# Altium PCB bms_afe_tester-1_1.PcbDoc (part 5 of 6)
Units mm, origin at the board's own origin, x right, y up, seen from the top; angles counter-clockwise.
Board outline 410 x 67 mm, 4 copper layers (L1, L2, L3, L4), stack 1.586 mm thick; 598 components, 356 nets, 1901 pads, 1542 vias.
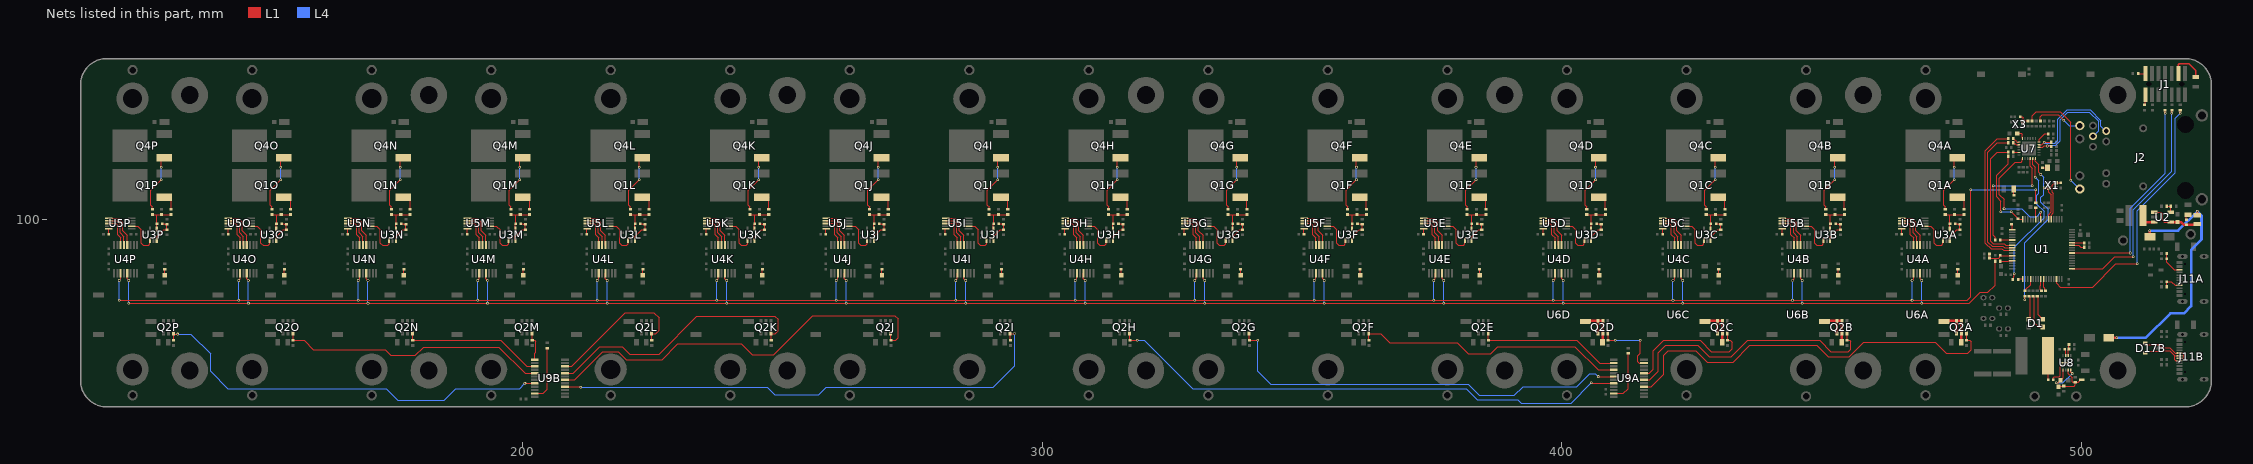
[diagram p6: the nets of this part, all layers, seen from the top]

## Via types
v1: diameter 0.5, hole 0.3, L1 to L4, 1524 vias
v2: diameter 0.65, hole 0.3, L1 to L4, 10 vias
v3: diameter 0.9, hole 0.6, L1 to L4, 8 vias

## Nets (pads, with @x,y where several pads share a name; then routed paths per layer and width w, separated by ;. In a path a pad name is that pad's centre, name@x,y a point inside that pad or via, vN(x,y) a via of type N, cw(c..) or ccw(c..) an arc to the next point about the centre after c; other vN are vias at no path point) (continued)
NetC3_1: C3.1 R5.1 R24.2 U1.27 | length 5.5
  L1 w0.2: R24.2@482.3,93.4 R5.1@482.3,92.6 484.1,92.6 484.252,92.752 484.252,92.952 484.4,93.1 U1.27@486.7,93.1
NetC10_1: C10.1 D5.2 R15.1 R45.2 U8.11 | length 8.5
  L1 w0.2: C10.1@495.6,67.85 495.75,68 R15.1@496.6,68 498.6,68 498.8,68.2 R45.2@498.8,68.7 ; U8.11@497.45,71.1 497.45,70.35 498.2,69.6 498.2,68.8 498.3,68.7 R45.2@498.8,68.7 ; D5.2@500.03,69.2 499.9,69.2 499.4,68.7 R45.2@498.8,68.7
NetC13_1: C13.1 R11.1 | length 1.2
  L1 w0.2: C13.1@486.95,105.9 487,105.85 R11.1@487,104.7
NetC17_1: C17.1 R9.1 | length 1.1
  L1 w0.2: R9.1@520.2,100 520.2,100.65 C17.1@520.5,100.95
NetC18_1: C18.1 FB2.2 R9.2 U2.1 U2.4 | length 10.1
  L1 w0.2: U2.1@513.99,101.45 515.25,101.45 515.6,101.1 515.6,99.9 515.95,99.55 U2.4@517.21,99.55
  L1 w0.5: U2.4@517.21,99.55 C18.1@518.5,99.55 519.15,99.55 519.7,99 R9.2@520.2,99 522.15,99 FB2.2@522.3,99.15
NetC21A_1: C21A.1 R42A.2 R53A.2 R55A.2 U3A.4 | length 6.4
  L1 w0.2: R55A.2@473.8,101 474.7,101 ; U3A.4@474.65,98.2 474.65,99.15 C21A.1@474.7,99.2 474.7,101 ; R42A.2@477.4,101 R53A.2@475.6,101 474.7,101
NetC21A_2: C21A.2 R17A.2 R19A.2 U3A.3 | length 5.2
  L1 w0.2: U3A.3@474.65,96 474.65,96.75 476,98.1 R19A.2@476.6,98.1 R17A.2@476.6,99.1 476.2,99.1 476.1,99.2 C21A.2@475.7,99.2
NetC21B_1: C21B.1 R42B.2 R53B.2 R55B.2 U3B.4 | length 6.4
  L1 w0.2: R55B.2@450.8,101 451.7,101 ; U3B.4@451.65,98.2 451.65,99.15 C21B.1@451.7,99.2 451.7,101 ; R42B.2@454.4,101 R53B.2@452.6,101 451.7,101
NetC21B_2: C21B.2 R17B.2 R19B.2 U3B.3 | length 5.2
  L1 w0.2: U3B.3@451.65,96 451.65,96.75 453,98.1 R19B.2@453.6,98.1 R17B.2@453.6,99.1 453.2,99.1 453.1,99.2 C21B.2@452.7,99.2
NetC21C_1: C21C.1 R42C.2 R53C.2 R55C.2 U3C.4 | length 6.4
  L1 w0.2: R55C.2@427.8,101 428.7,101 ; U3C.4@428.65,98.2 428.65,99.15 C21C.1@428.7,99.2 428.7,101 ; R42C.2@431.4,101 R53C.2@429.6,101 428.7,101
NetC21C_2: C21C.2 R17C.2 R19C.2 U3C.3 | length 5.2
  L1 w0.2: U3C.3@428.65,96 428.65,96.75 430,98.1 R19C.2@430.6,98.1 R17C.2@430.6,99.1 430.2,99.1 430.1,99.2 C21C.2@429.7,99.2
NetC21D_1: C21D.1 R42D.2 R53D.2 R55D.2 U3D.4 | length 6.4
  L1 w0.2: R55D.2@404.8,101 405.7,101 ; U3D.4@405.65,98.2 405.65,99.15 C21D.1@405.7,99.2 405.7,101 ; R42D.2@408.4,101 R53D.2@406.6,101 405.7,101
NetC21D_2: C21D.2 R17D.2 R19D.2 U3D.3 | length 5.2
  L1 w0.2: U3D.3@405.65,96 405.65,96.75 407,98.1 R19D.2@407.6,98.1 R17D.2@407.6,99.1 407.2,99.1 407.1,99.2 C21D.2@406.7,99.2
NetC21E_1: C21E.1 R42E.2 R53E.2 R55E.2 U3E.4 | length 6.4
  L1 w0.2: R55E.2@381.8,101 382.7,101 ; U3E.4@382.65,98.2 382.65,99.15 C21E.1@382.7,99.2 382.7,101 ; R42E.2@385.4,101 R53E.2@383.6,101 382.7,101
NetC21E_2: C21E.2 R17E.2 R19E.2 U3E.3 | length 5.2
  L1 w0.2: U3E.3@382.65,96 382.65,96.75 384,98.1 R19E.2@384.6,98.1 R17E.2@384.6,99.1 384.2,99.1 384.1,99.2 C21E.2@383.7,99.2
NetC21F_1: C21F.1 R42F.2 R53F.2 R55F.2 U3F.4 | length 6.4
  L1 w0.2: R55F.2@358.8,101 359.7,101 ; U3F.4@359.65,98.2 359.65,99.15 C21F.1@359.7,99.2 359.7,101 ; R42F.2@362.4,101 R53F.2@360.6,101 359.7,101
NetC21F_2: C21F.2 R17F.2 R19F.2 U3F.3 | length 5.2
  L1 w0.2: U3F.3@359.65,96 359.65,96.75 361,98.1 R19F.2@361.6,98.1 R17F.2@361.6,99.1 361.2,99.1 361.1,99.2 C21F.2@360.7,99.2
NetC21G_1: C21G.1 R42G.2 R53G.2 R55G.2 U3G.4 | length 6.4
  L1 w0.2: R55G.2@335.8,101 336.7,101 ; U3G.4@336.65,98.2 336.65,99.15 C21G.1@336.7,99.2 336.7,101 ; R42G.2@339.4,101 R53G.2@337.6,101 336.7,101
NetC21G_2: C21G.2 R17G.2 R19G.2 U3G.3 | length 5.2
  L1 w0.2: U3G.3@336.65,96 336.65,96.75 338,98.1 R19G.2@338.6,98.1 R17G.2@338.6,99.1 338.2,99.1 338.1,99.2 C21G.2@337.7,99.2
NetC21H_1: C21H.1 R42H.2 R53H.2 R55H.2 U3H.4 | length 6.4
  L1 w0.2: R55H.2@312.8,101 313.7,101 ; U3H.4@313.65,98.2 313.65,99.15 C21H.1@313.7,99.2 313.7,101 ; R42H.2@316.4,101 R53H.2@314.6,101 313.7,101
NetC21H_2: C21H.2 R17H.2 R19H.2 U3H.3 | length 5.2
  L1 w0.2: U3H.3@313.65,96 313.65,96.75 315,98.1 R19H.2@315.6,98.1 R17H.2@315.6,99.1 315.2,99.1 315.1,99.2 C21H.2@314.7,99.2
NetC21I_1: C21I.1 R42I.2 R53I.2 R55I.2 U3I.4 | length 6.4
  L1 w0.2: R55I.2@289.8,101 290.7,101 ; U3I.4@290.65,98.2 290.65,99.15 C21I.1@290.7,99.2 290.7,101 ; R42I.2@293.4,101 R53I.2@291.6,101 290.7,101
NetC21I_2: C21I.2 R17I.2 R19I.2 U3I.3 | length 5.2
  L1 w0.2: U3I.3@290.65,96 290.65,96.75 292,98.1 R19I.2@292.6,98.1 R17I.2@292.6,99.1 292.2,99.1 292.1,99.2 C21I.2@291.7,99.2
NetC21J_1: C21J.1 R42J.2 R53J.2 R55J.2 U3J.4 | length 6.4
  L1 w0.2: R55J.2@266.8,101 267.7,101 ; U3J.4@267.65,98.2 267.65,99.15 C21J.1@267.7,99.2 267.7,101 ; R42J.2@270.4,101 R53J.2@268.6,101 267.7,101
NetC21J_2: C21J.2 R17J.2 R19J.2 U3J.3 | length 5.2
  L1 w0.2: U3J.3@267.65,96 267.65,96.75 269,98.1 R19J.2@269.6,98.1 R17J.2@269.6,99.1 269.2,99.1 269.1,99.2 C21J.2@268.7,99.2
NetC21K_1: C21K.1 R42K.2 R53K.2 R55K.2 U3K.4 | length 6.4
  L1 w0.2: R55K.2@243.8,101 244.7,101 ; U3K.4@244.65,98.2 244.65,99.15 C21K.1@244.7,99.2 244.7,101 ; R42K.2@247.4,101 R53K.2@245.6,101 244.7,101
NetC21K_2: C21K.2 R17K.2 R19K.2 U3K.3 | length 5.2
  L1 w0.2: U3K.3@244.65,96 244.65,96.75 246,98.1 R19K.2@246.6,98.1 R17K.2@246.6,99.1 246.2,99.1 246.1,99.2 C21K.2@245.7,99.2
NetC21L_1: C21L.1 R42L.2 R53L.2 R55L.2 U3L.4 | length 6.4
  L1 w0.2: R55L.2@220.8,101 221.7,101 ; U3L.4@221.65,98.2 221.65,99.15 C21L.1@221.7,99.2 221.7,101 ; R42L.2@224.4,101 R53L.2@222.6,101 221.7,101
NetC21L_2: C21L.2 R17L.2 R19L.2 U3L.3 | length 5.2
  L1 w0.2: U3L.3@221.65,96 221.65,96.75 223,98.1 R19L.2@223.6,98.1 R17L.2@223.6,99.1 223.2,99.1 223.1,99.2 C21L.2@222.7,99.2
NetC21M_1: C21M.1 R42M.2 R53M.2 R55M.2 U3M.4 | length 6.4
  L1 w0.2: R55M.2@197.8,101 198.7,101 ; U3M.4@198.65,98.2 198.65,99.15 C21M.1@198.7,99.2 198.7,101 ; R42M.2@201.4,101 R53M.2@199.6,101 198.7,101
NetC21M_2: C21M.2 R17M.2 R19M.2 U3M.3 | length 5.2
  L1 w0.2: U3M.3@198.65,96 198.65,96.75 200,98.1 R19M.2@200.6,98.1 R17M.2@200.6,99.1 200.2,99.1 200.1,99.2 C21M.2@199.7,99.2
NetC21N_1: C21N.1 R42N.2 R53N.2 R55N.2 U3N.4 | length 6.4
  L1 w0.2: R55N.2@174.8,101 175.7,101 ; U3N.4@175.65,98.2 175.65,99.15 C21N.1@175.7,99.2 175.7,101 ; R42N.2@178.4,101 R53N.2@176.6,101 175.7,101
NetC21N_2: C21N.2 R17N.2 R19N.2 U3N.3 | length 5.2
  L1 w0.2: U3N.3@175.65,96 175.65,96.75 177,98.1 R19N.2@177.6,98.1 R17N.2@177.6,99.1 177.2,99.1 177.1,99.2 C21N.2@176.7,99.2
NetC21O_1: C21O.1 R42O.2 R53O.2 R55O.2 U3O.4 | length 6.4
  L1 w0.2: R55O.2@151.8,101 152.7,101 ; U3O.4@152.65,98.2 152.65,99.15 C21O.1@152.7,99.2 152.7,101 ; R42O.2@155.4,101 R53O.2@153.6,101 152.7,101
NetC21O_2: C21O.2 R17O.2 R19O.2 U3O.3 | length 5.2
  L1 w0.2: U3O.3@152.65,96 152.65,96.75 154,98.1 R19O.2@154.6,98.1 R17O.2@154.6,99.1 154.2,99.1 154.1,99.2 C21O.2@153.7,99.2
NetC21P_1: C21P.1 R42P.2 R53P.2 R55P.2 U3P.4 | length 6.4
  L1 w0.2: R55P.2@128.8,101 129.7,101 ; U3P.4@129.65,98.2 129.65,99.15 C21P.1@129.7,99.2 129.7,101 ; R42P.2@132.4,101 R53P.2@130.6,101 129.7,101
NetC21P_2: C21P.2 R17P.2 R19P.2 U3P.3 | length 5.2
  L1 w0.2: U3P.3@129.65,96 129.65,96.75 131,98.1 R19P.2@131.6,98.1 R17P.2@131.6,99.1 131.2,99.1 131.1,99.2 C21P.2@130.7,99.2
NetC27A_1: C27A.1 U5A.10 | length 1.1
  L1 w0.2: C27A.1@465.4,97.2 465.4,98.227 U5A.10@465.447,98.275
NetC27B_1: C27B.1 U5B.10 | length 1.1
  L1 w0.2: C27B.1@442.4,97.2 442.4,98.227 U5B.10@442.447,98.275
NetC27C_1: C27C.1 U5C.10 | length 1.1
  L1 w0.2: C27C.1@419.4,97.2 419.4,98.227 U5C.10@419.447,98.275
NetC27D_1: C27D.1 U5D.10 | length 1.1
  L1 w0.2: C27D.1@396.4,97.2 396.4,98.227 U5D.10@396.447,98.275
NetC27E_1: C27E.1 U5E.10 | length 1.1
  L1 w0.2: C27E.1@373.4,97.2 373.4,98.227 U5E.10@373.447,98.275
NetC27F_1: C27F.1 U5F.10 | length 1.1
  L1 w0.2: C27F.1@350.4,97.2 350.4,98.227 U5F.10@350.447,98.275
NetC27G_1: C27G.1 U5G.10 | length 1.1
  L1 w0.2: C27G.1@327.4,97.2 327.4,98.227 U5G.10@327.447,98.275
NetC27H_1: C27H.1 U5H.10 | length 1.1
  L1 w0.2: C27H.1@304.4,97.2 304.4,98.227 U5H.10@304.447,98.275
NetC27I_1: C27I.1 U5I.10 | length 1.1
  L1 w0.2: C27I.1@281.4,97.2 281.4,98.227 U5I.10@281.447,98.275
NetC27J_1: C27J.1 U5J.10 | length 1.1
  L1 w0.2: C27J.1@258.4,97.2 258.4,98.227 U5J.10@258.447,98.275
NetC27K_1: C27K.1 U5K.10 | length 1.1
  L1 w0.2: C27K.1@235.4,97.2 235.4,98.227 U5K.10@235.447,98.275
NetC27L_1: C27L.1 U5L.10 | length 1.1
  L1 w0.2: C27L.1@212.4,97.2 212.4,98.227 U5L.10@212.447,98.275
NetC27M_1: C27M.1 U5M.10 | length 1.1
  L1 w0.2: C27M.1@189.4,97.2 189.4,98.227 U5M.10@189.447,98.275
NetC27N_1: C27N.1 U5N.10 | length 1.1
  L1 w0.2: C27N.1@166.4,97.2 166.4,98.227 U5N.10@166.447,98.275
NetC27O_1: C27O.1 U5O.10 | length 1.1
  L1 w0.2: C27O.1@143.4,97.2 143.4,98.227 U5O.10@143.447,98.275
NetC27P_1: C27P.1 U5P.10 | length 1.1
  L1 w0.2: C27P.1@120.4,97.2 120.4,98.227 U5P.10@120.447,98.275
NetC28_1: C28.1 U8.8 | length 4.1
  L1 w0.2: C28.1@494.6,69.2 494.6,69.6 494.8,69.8 495.7,69.8 495.9,70 495.9,71.8 496.1,72 U8.8@496.3,72
NetC28_2: C28.2 L2.1 U8.7 | length 4.6
  L1 w0.2: L2.1@493.55,73.8 493.6,73.75 C28.2@493.6,69.2
NetC31_1: C31.1 U8.9 U8.12 | length 7.9
  L1 w0.2: v1(495.109,68.642) 495.492,68.642 C31.1@495.95,69.1 496.45,69.6 U8.9@496.45,71.1 ; U8.12@497.95,71.1 497.973,71.077 497.973,70.667 498.2,70.44 v1(498.2,70.4)
  L4 w0.2: v1(495.109,68.642) 495.109,68.6 496.4,68.6 v1(498.2,70.4)
NetC34A_1: C34A.1 J11A.B5 R12A.1 | length 4.8
  L1 w0.2: R12A.1@516.4,93.5 516.4,91.8 517.85,90.35 J11A.B5@518.85,90.35
NetC35A_1: C35A.1 J11A.A5 R13A.1 | length 3.8
  L1 w0.2: R13A.1@516.4,87.1 C35A.1@516.4,88.1 517.3,88.1 518.05,87.35 J11A.A5@518.85,87.35
NetC39_1: C39.1 U8.5 | length 1.3
  L1 w0.2: C39.1@496.8,75.1 496.95,74.95 U8.5@496.95,73.9
NetC48_1: C48.1 R84.1 | length 0.9
  L1 w0.203: R84.1@492.5,110 C48.1@493.45,110
NetC50_1: C50.1 U7.6 | length 1.8
  L1 w0.203: C50.1@487.65,116.6 488.4,116.6 488.65,116.35 U7.6@488.65,115.65
NetC52_1: C52.1 R56.2 X3.1 | length 2.3
  L1 w0.203: C52.1@488.2,119.8 488.6,119.8 488.775,119.625 488.775,119 X3.1@488.775,118.9 488.875,119 R56.2@489.7,119
NetD1_1: D1.1 R7.1 | length 7.1
  L1 w0.2: R7.1@490.9,85.3 490.9,80.2 491.75,79.35 D1.1@492.55,79.35
NetD1_3: D1.3 R2.1 | length 4.8
  L1 w0.2: R2.1@491.7,85.3 491.7,81.7 D1.3@492.55,80.85
NetD1_4: D1.4 R1.1 | length 4.2
  L1 w0.2: D1.4@490.1,81.1 R1.1@490.1,85.3
NetD2_2: D2.2 D6.2 FB2.1 | length 50.4
  L1 w0.5: D2.2@505.25,77.3 v1(506.8,77.3) ; D6.2@513.15,96.7 513.15,97.91 v1(513.152,97.912) ; FB2.1@522.3,100.85 v1(522.3,101.6)
  L4 w0.5: v1(506.8,77.3) 512.4,77.3 517.1,82 519.7,82 521.1,83.4 521.1,94.2 523.1,96.2 523.1,100.8 v1(522.3,101.6) 518.612,97.912 v1(513.152,97.912)
NetD4A_1: D4A.1 R44A.1 | length 1.2
  L1 w0.2: D4A.1@476.2,89.3 R44A.1@476.2,90.5
NetD4B_1: D4B.1 R44B.1 | length 1.2
  L1 w0.2: D4B.1@453.2,89.3 R44B.1@453.2,90.5
NetD4C_1: D4C.1 R44C.1 | length 1.2
  L1 w0.2: D4C.1@430.2,89.3 R44C.1@430.2,90.5
NetD4D_1: D4D.1 R44D.1 | length 1.2
  L1 w0.2: D4D.1@407.2,89.3 R44D.1@407.2,90.5
NetD4E_1: D4E.1 R44E.1 | length 1.2
  L1 w0.2: D4E.1@384.2,89.3 R44E.1@384.2,90.5
NetD4F_1: D4F.1 R44F.1 | length 1.2
  L1 w0.2: D4F.1@361.2,89.3 R44F.1@361.2,90.5
NetD4G_1: D4G.1 R44G.1 | length 1.2
  L1 w0.2: D4G.1@338.2,89.3 R44G.1@338.2,90.5
NetD4H_1: D4H.1 R44H.1 | length 1.2
  L1 w0.2: D4H.1@315.2,89.3 R44H.1@315.2,90.5
NetD4I_1: D4I.1 R44I.1 | length 1.2
  L1 w0.2: D4I.1@292.2,89.3 R44I.1@292.2,90.5
NetD4J_1: D4J.1 R44J.1 | length 1.2
  L1 w0.2: D4J.1@269.2,89.3 R44J.1@269.2,90.5
NetD4K_1: D4K.1 R44K.1 | length 1.2
  L1 w0.2: D4K.1@246.2,89.3 R44K.1@246.2,90.5
NetD4L_1: D4L.1 R44L.1 | length 1.2
  L1 w0.2: D4L.1@223.2,89.3 R44L.1@223.2,90.5
NetD4M_1: D4M.1 R44M.1 | length 1.2
  L1 w0.2: D4M.1@200.2,89.3 R44M.1@200.2,90.5
NetD4N_1: D4N.1 R44N.1 | length 1.2
  L1 w0.2: D4N.1@177.2,89.3 R44N.1@177.2,90.5
NetD4O_1: D4O.1 R44O.1 | length 1.2
  L1 w0.2: D4O.1@154.2,89.3 R44O.1@154.2,90.5
NetD4P_1: D4P.1 R44P.1 | length 1.2
  L1 w0.2: D4P.1@131.2,89.3 R44P.1@131.2,90.5
NetD17B_1: D17B.1 J11B.A6 J11B.B6 | length 9.9
  L1 w0.2: D17B.1@512.275,76.25 512.625,75.9 515,75.9 515.5,75.4 517,75.4 518.05,74.35 J11B.B6@518.85,74.35 519.55,74.35 519.7,74.2 519.7,73.5 519.55,73.35 J11B.A6@518.85,73.35
NetD17B_2: D17B.2 J11B.A7 J11B.B7 | length 8.9
  L1 w0.2: J11B.B7@518.85,72.85 518.15,72.85 517.95,73.05 517.95,73.85 J11B.A7@518.85,73.85
  L1 w0.203: D17B.2@512.275,74.35 512.625,74.7 515.3,74.7 515.4,74.8 517,74.8 517.95,73.85
NetJ1_3: J1.3 R20.1 | length 6.9
  L1 w0.3: J1.3@518.64,128.132 518.64,129.84 518.8,130 520.7,130 522,128.7 R20.1@522,127.45
NetJ1_13: J1.13 R28.2 | length 1.4
  L1 w0.2: R28.2@510.9,128.1 512.258,128.1 J1.13@512.29,128.132
NetJ1_14: J1.14 R29.2 | length 2
  L1 w0.2: J1.14@512.29,124.068 512.3,124.058 R29.2@512.3,122.1
NetJ2_12: J2.12 R97.1 | length 9.4
  L1 w0.2: R97.1@492.1,119 492.1,119.8 492.5,120.2 495.5,120.2 v1(496.562,119.138)
  L4 w0.2: v1(496.562,119.138) 497.604,118.096 J2.12@499.68,118.096
NetJ2_15: J2.15 R96.1 | length 23.2
  L1 w0.2: R96.1@490.5,119 490.5,120 491.3,120.8 495.9,120.8 497.9,118.8 v1(497.9,107.6)
  L4 w0.2: v1(497.9,107.6) 497.984,107.6 J2.15@499.68,105.904
NetL1_1: L1.1 U2.3 | length 3.4
  L1 w0.5: L1.1@511.85,100.8 511.85,99.55 U2.3@513.99,99.55
NetQ1A_1: Q1A.1 R42A.1 | length 3.5
  L1 w0.2: Q1A.1@476.1,104.314 477.286,104.314 477.4,104.2 R42A.1@477.4,102
NetQ1B_1: Q1B.1 R42B.1 | length 3.5
  L1 w0.2: Q1B.1@453.1,104.314 454.286,104.314 454.4,104.2 R42B.1@454.4,102
NetQ1C_1: Q1C.1 R42C.1 | length 3.5
  L1 w0.2: Q1C.1@430.1,104.314 431.286,104.314 431.4,104.2 R42C.1@431.4,102
NetQ1D_1: Q1D.1 R42D.1 | length 3.5
  L1 w0.2: Q1D.1@407.1,104.314 408.286,104.314 408.4,104.2 R42D.1@408.4,102
NetQ1E_1: Q1E.1 R42E.1 | length 3.5
  L1 w0.2: Q1E.1@384.1,104.314 385.286,104.314 385.4,104.2 R42E.1@385.4,102
NetQ1F_1: Q1F.1 R42F.1 | length 3.5
  L1 w0.2: Q1F.1@361.1,104.314 362.286,104.314 362.4,104.2 R42F.1@362.4,102
NetQ1G_1: Q1G.1 R42G.1 | length 3.5
  L1 w0.2: Q1G.1@338.1,104.314 339.286,104.314 339.4,104.2 R42G.1@339.4,102
NetQ1H_1: Q1H.1 R42H.1 | length 3.5
  L1 w0.2: Q1H.1@315.1,104.314 316.286,104.314 316.4,104.2 R42H.1@316.4,102
NetQ1I_1: Q1I.1 R42I.1 | length 3.5
  L1 w0.2: Q1I.1@292.1,104.314 293.286,104.314 293.4,104.2 R42I.1@293.4,102
NetQ1J_1: Q1J.1 R42J.1 | length 3.5
  L1 w0.2: Q1J.1@269.1,104.314 270.286,104.314 270.4,104.2 R42J.1@270.4,102
NetQ1K_1: Q1K.1 R42K.1 | length 3.5
  L1 w0.2: Q1K.1@246.1,104.314 247.286,104.314 247.4,104.2 R42K.1@247.4,102
NetQ1L_1: Q1L.1 R42L.1 | length 3.5
  L1 w0.2: Q1L.1@223.1,104.314 224.286,104.314 224.4,104.2 R42L.1@224.4,102
NetQ1M_1: Q1M.1 R42M.1 | length 3.5
  L1 w0.2: Q1M.1@200.1,104.314 201.286,104.314 201.4,104.2 R42M.1@201.4,102
NetQ1N_1: Q1N.1 R42N.1 | length 3.5
  L1 w0.2: Q1N.1@177.1,104.314 178.286,104.314 178.4,104.2 R42N.1@178.4,102
NetQ1O_1: Q1O.1 R42O.1 | length 3.5
  L1 w0.2: Q1O.1@154.1,104.314 155.286,104.314 155.4,104.2 R42O.1@155.4,102
NetQ1P_1: Q1P.1 R42P.1 | length 3.5
  L1 w0.2: Q1P.1@131.1,104.314 132.286,104.314 132.4,104.2 R42P.1@132.4,102
NetQ4A_1: Q4A.1 R55A.1 | length 11.1
  L1 w0.2: R55A.1@473.8,102 473.8,102.5 473.5,102.8 473.5,105.7 v1(475.5,107.7) ; v1(475.5,110.1) 475.5,111.314 Q4A.1@476.1,111.914
  L4 w0.2: v1(475.5,107.7) v1(475.5,110.1)
NetQ4B_1: Q4B.1 R55B.1 | length 11.1
  L1 w0.2: R55B.1@450.8,102 450.8,102.5 450.5,102.8 450.5,105.7 v1(452.5,107.7) ; v1(452.5,110.1) 452.5,111.314 Q4B.1@453.1,111.914
  L4 w0.2: v1(452.5,107.7) v1(452.5,110.1)
NetQ4C_1: Q4C.1 R55C.1 | length 11.1
  L1 w0.2: R55C.1@427.8,102 427.8,102.5 427.5,102.8 427.5,105.7 v1(429.5,107.7) ; v1(429.5,110.1) 429.5,111.314 Q4C.1@430.1,111.914
  L4 w0.2: v1(429.5,107.7) v1(429.5,110.1)
NetQ4D_1: Q4D.1 R55D.1 | length 11.1
  L1 w0.2: R55D.1@404.8,102 404.8,102.5 404.5,102.8 404.5,105.7 v1(406.5,107.7) ; v1(406.5,110.1) 406.5,111.314 Q4D.1@407.1,111.914
  L4 w0.2: v1(406.5,107.7) v1(406.5,110.1)
NetQ4E_1: Q4E.1 R55E.1 | length 11.1
  L1 w0.2: R55E.1@381.8,102 381.8,102.5 381.5,102.8 381.5,105.7 v1(383.5,107.7) ; v1(383.5,110.1) 383.5,111.314 Q4E.1@384.1,111.914
  L4 w0.2: v1(383.5,107.7) v1(383.5,110.1)
NetQ4F_1: Q4F.1 R55F.1 | length 11.1
  L1 w0.2: R55F.1@358.8,102 358.8,102.5 358.5,102.8 358.5,105.7 v1(360.5,107.7) ; v1(360.5,110.1) 360.5,111.314 Q4F.1@361.1,111.914
  L4 w0.2: v1(360.5,107.7) v1(360.5,110.1)
NetQ4G_1: Q4G.1 R55G.1 | length 11.1
  L1 w0.2: R55G.1@335.8,102 335.8,102.5 335.5,102.8 335.5,105.7 v1(337.5,107.7) ; v1(337.5,110.1) 337.5,111.314 Q4G.1@338.1,111.914
  L4 w0.2: v1(337.5,107.7) v1(337.5,110.1)
NetQ4H_1: Q4H.1 R55H.1 | length 11.1
  L1 w0.2: R55H.1@312.8,102 312.8,102.5 312.5,102.8 312.5,105.7 v1(314.5,107.7) ; v1(314.5,110.1) 314.5,111.314 Q4H.1@315.1,111.914
  L4 w0.2: v1(314.5,107.7) v1(314.5,110.1)
NetQ4I_1: Q4I.1 R55I.1 | length 11.1
  L1 w0.2: R55I.1@289.8,102 289.8,102.5 289.5,102.8 289.5,105.7 v1(291.5,107.7) ; v1(291.5,110.1) 291.5,111.314 Q4I.1@292.1,111.914
  L4 w0.2: v1(291.5,107.7) v1(291.5,110.1)
NetQ4J_1: Q4J.1 R55J.1 | length 11.1
  L1 w0.2: R55J.1@266.8,102 266.8,102.5 266.5,102.8 266.5,105.7 v1(268.5,107.7) ; v1(268.5,110.1) 268.5,111.314 Q4J.1@269.1,111.914
  L4 w0.2: v1(268.5,107.7) v1(268.5,110.1)
NetQ4K_1: Q4K.1 R55K.1 | length 11.1
  L1 w0.2: R55K.1@243.8,102 243.8,102.5 243.5,102.8 243.5,105.7 v1(245.5,107.7) ; v1(245.5,110.1) 245.5,111.314 Q4K.1@246.1,111.914
  L4 w0.2: v1(245.5,107.7) v1(245.5,110.1)
NetQ4L_1: Q4L.1 R55L.1 | length 11.1
  L1 w0.2: R55L.1@220.8,102 220.8,102.5 220.5,102.8 220.5,105.7 v1(222.5,107.7) ; v1(222.5,110.1) 222.5,111.314 Q4L.1@223.1,111.914
  L4 w0.2: v1(222.5,107.7) v1(222.5,110.1)
NetQ4M_1: Q4M.1 R55M.1 | length 11.1
  L1 w0.2: R55M.1@197.8,102 197.8,102.5 197.5,102.8 197.5,105.7 v1(199.5,107.7) ; v1(199.5,110.1) 199.5,111.314 Q4M.1@200.1,111.914
  L4 w0.2: v1(199.5,107.7) v1(199.5,110.1)
NetQ4N_1: Q4N.1 R55N.1 | length 11.1
  L1 w0.2: R55N.1@174.8,102 174.8,102.5 174.5,102.8 174.5,105.7 v1(176.5,107.7) ; v1(176.5,110.1) 176.5,111.314 Q4N.1@177.1,111.914
  L4 w0.2: v1(176.5,107.7) v1(176.5,110.1)
NetQ4O_1: Q4O.1 R55O.1 | length 11.1
  L1 w0.2: R55O.1@151.8,102 151.8,102.5 151.5,102.8 151.5,105.7 v1(153.5,107.7) ; v1(153.5,110.1) 153.5,111.314 Q4O.1@154.1,111.914
  L4 w0.2: v1(153.5,107.7) v1(153.5,110.1)
NetQ4P_1: Q4P.1 R55P.1 | length 11.1
  L1 w0.2: R55P.1@128.8,102 128.8,102.5 128.5,102.8 128.5,105.7 v1(130.5,107.7) ; v1(130.5,110.1) 130.5,111.314 Q4P.1@131.1,111.914
  L4 w0.2: v1(130.5,107.7) v1(130.5,110.1)
NetR3_2: R3.2 U1.17 | length 1.1
  L1 w0.2: R3.2@486.5,99.1 486.7,98.9 U1.17@486.7,98.1
NetR4_2: R4.2 U1.41 | length 2.5
  L1 w0.2: U1.41@492.7,88.6 492.7,87.033 492.903,86.83 492.903,86.497 R4.2@493.1,86.3
NetR8_2: R8.2 R10.1 U2.5 | length 2
  L1 w0.2: R8.2@516.4,102.6 R10.1@517.2,102.6 517.21,102.59 U2.5@517.21,101.45
NetR25_1: R25.1 R27.1 U8.4 | length 2.2
  L1 w0.2: U8.4@497.45,73.9 497.45,74.95 R27.1@497.6,75.1 R25.1@497.6,76
NetR31_2: R31.2 U1.29 | length 2.3
  L1 w0.2: R31.2@484.4,92 485.9,92 486,92.1 U1.29@486.7,92.1
NetR33_2: R33.2 U1.11 | length 2.2
  L1 w0.2: U1.11@491.2,100.1 R33.2@491.2,102.3
NetR35_2: R35.2 U1.59 | length 2.3
  L1 w0.2: U1.59@498.2,95.6 500.4,95.6 R35.2@500.5,95.5
NetR36_2: R36.2 U1.58 | length 2.5
  L1 w0.203: U1.58@498.2,95.1 499.5,95.1 499.9,94.7 R36.2@500.5,94.7
NetR37_2: R37.2 U1.40 | length 2.4
  L1 w0.2: U1.40@492.2,88.6 492.2,87.4 492.104,87.304 492.104,86.496 R37.2@492.3,86.3
NetR38_2: R38.2 U1.21 | length 2.3
  L1 w0.2: R38.2@484.4,96.1 U1.21@486.7,96.1
NetR40_2: R40.2 U1.33 | length 0.9
  L1 w0.203: R40.2@487.8,88.5 487.9,88.6 U1.33@488.7,88.6
NetR41_2: R41.2 U1.36 | length 2.8
  L1 w0.2: R41.2@489.1,86.3 489.3,86.5 489.3,86.624 490.2,87.524 U1.36@490.2,88.6
NetR46A_1: R46A.1 U9A.23 | length 10
  L1 w0.2: U9A.23@410,66.575 411.875,66.575 412.8,67.5 R46A.1@412.8,74.3
NetR46B_1: R46B.1 U9B.23 | length 10.6
  L1 w0.2: U9B.23@202.4,66.575 203.975,66.575 204.8,67.4 R46B.1@204.8,75.3
NetR86_1: R86.1 U7.24 | length 2.7
  L1 w0.2: U7.24@491.85,114.95 491.85,115.45 492.9,116.5 R86.1@493.6,116.5
NetR91_1: R91.1 U7.11 | length 1.1
  L1 w0.2: R91.1@486.9,113 486.95,112.95 U7.11@487.95,112.95
NetR92_1: R92.1 U7.8 | length 1.2
  L1 w0.2: R92.1@486.9,114.8 487.1,114.6 487.3,114.6 487.45,114.45 U7.8@487.95,114.45
NetR93_1: R93.1 U7.7 | length 1.4
  L1 w0.2: R93.1@486.9,115.6 487.1,115.4 487.3,115.4 487.402,115.298 487.402,115.098 487.55,114.95 U7.7@487.95,114.95
NetU3A_1: U3A.1 U5A.2 | length 7.3
  L1 w0.2: U5A.2@469.847,98.775 471.025,98.775 471.7,98.1 471.7,95.5 472.1,95.1 473.1,95.1 473.35,95.35 U3A.1@473.35,96
NetU3B_1: U3B.1 U5B.2 | length 7.3
  L1 w0.2: U5B.2@446.847,98.775 448.025,98.775 448.7,98.1 448.7,95.5 449.1,95.1 450.1,95.1 450.35,95.35 U3B.1@450.35,96
NetU3C_1: U3C.1 U5C.2 | length 7.3
  L1 w0.2: U5C.2@423.847,98.775 425.025,98.775 425.7,98.1 425.7,95.5 426.1,95.1 427.1,95.1 427.35,95.35 U3C.1@427.35,96
NetU3D_1: U3D.1 U5D.2 | length 7.3
  L1 w0.2: U5D.2@400.847,98.775 402.025,98.775 402.7,98.1 402.7,95.5 403.1,95.1 404.1,95.1 404.35,95.35 U3D.1@404.35,96
NetU3E_1: U3E.1 U5E.2 | length 7.3
  L1 w0.2: U5E.2@377.847,98.775 379.025,98.775 379.7,98.1 379.7,95.5 380.1,95.1 381.1,95.1 381.35,95.35 U3E.1@381.35,96
NetU3F_1: U3F.1 U5F.2 | length 7.3
  L1 w0.2: U5F.2@354.847,98.775 356.025,98.775 356.7,98.1 356.7,95.5 357.1,95.1 358.1,95.1 358.35,95.35 U3F.1@358.35,96
NetU3G_1: U3G.1 U5G.2 | length 7.3
  L1 w0.2: U5G.2@331.847,98.775 333.025,98.775 333.7,98.1 333.7,95.5 334.1,95.1 335.1,95.1 335.35,95.35 U3G.1@335.35,96
NetU3H_1: U3H.1 U5H.2 | length 7.3
  L1 w0.2: U5H.2@308.847,98.775 310.025,98.775 310.7,98.1 310.7,95.5 311.1,95.1 312.1,95.1 312.35,95.35 U3H.1@312.35,96
NetU3I_1: U3I.1 U5I.2 | length 7.3
  L1 w0.2: U5I.2@285.847,98.775 287.025,98.775 287.7,98.1 287.7,95.5 288.1,95.1 289.1,95.1 289.35,95.35 U3I.1@289.35,96
NetU3J_1: U3J.1 U5J.2 | length 7.3
  L1 w0.2: U5J.2@262.847,98.775 264.025,98.775 264.7,98.1 264.7,95.5 265.1,95.1 266.1,95.1 266.35,95.35 U3J.1@266.35,96
NetU3K_1: U3K.1 U5K.2 | length 7.3
  L1 w0.2: U5K.2@239.847,98.775 241.025,98.775 241.7,98.1 241.7,95.5 242.1,95.1 243.1,95.1 243.35,95.35 U3K.1@243.35,96
NetU3L_1: U3L.1 U5L.2 | length 7.3
  L1 w0.2: U5L.2@216.847,98.775 218.025,98.775 218.7,98.1 218.7,95.5 219.1,95.1 220.1,95.1 220.35,95.35 U3L.1@220.35,96
NetU3M_1: U3M.1 U5M.2 | length 7.3
  L1 w0.2: U5M.2@193.847,98.775 195.025,98.775 195.7,98.1 195.7,95.5 196.1,95.1 197.1,95.1 197.35,95.35 U3M.1@197.35,96
NetU3N_1: U3N.1 U5N.2 | length 7.3
  L1 w0.2: U5N.2@170.847,98.775 172.025,98.775 172.7,98.1 172.7,95.5 173.1,95.1 174.1,95.1 174.35,95.35 U3N.1@174.35,96
NetU3O_1: U3O.1 U5O.2 | length 7.3
  L1 w0.2: U5O.2@147.847,98.775 149.025,98.775 149.7,98.1 149.7,95.5 150.1,95.1 151.1,95.1 151.35,95.35 U3O.1@151.35,96
NetU3P_1: U3P.1 U5P.2 | length 7.3
  L1 w0.2: U5P.2@124.847,98.775 126.025,98.775 126.7,98.1 126.7,95.5 127.1,95.1 128.1,95.1 128.35,95.35 U3P.1@128.35,96
NetU4A_12: U4A.12 U5A.6 | length 7.7
  L1 w0.2: U5A.6@465.447,100.275 467.325,100.275 468.1,99.5 468.1,97.9 468.97,97.03 U4A.12@468.97,95.1
NetU4A_13: U4A.13 U5A.7 | length 6.8
  L1 w0.2: U5A.7@465.447,99.775 467.025,99.775 467.6,99.2 467.6,97.5 468.335,96.765 U4A.13@468.335,95.1
NetU4A_14: U4A.14 U5A.8 | length 5.9
  L1 w0.2: U5A.8@465.447,99.275 466.725,99.275 467.1,98.9 467.1,97.1 467.7,96.5 U4A.14@467.7,95.1
NetU4B_12: U4B.12 U5B.6 | length 7.7
  L1 w0.2: U5B.6@442.447,100.275 444.325,100.275 445.1,99.5 445.1,97.9 445.97,97.03 U4B.12@445.97,95.1
NetU4B_13: U4B.13 U5B.7 | length 6.8
  L1 w0.2: U5B.7@442.447,99.775 444.025,99.775 444.6,99.2 444.6,97.5 445.335,96.765 U4B.13@445.335,95.1
NetU4B_14: U4B.14 U5B.8 | length 5.9
  L1 w0.2: U5B.8@442.447,99.275 443.725,99.275 444.1,98.9 444.1,97.1 444.7,96.5 U4B.14@444.7,95.1
NetU4C_12: U4C.12 U5C.6 | length 7.7
  L1 w0.2: U5C.6@419.447,100.275 421.325,100.275 422.1,99.5 422.1,97.9 422.97,97.03 U4C.12@422.97,95.1
NetU4C_13: U4C.13 U5C.7 | length 6.8
  L1 w0.2: U5C.7@419.447,99.775 421.025,99.775 421.6,99.2 421.6,97.5 422.335,96.765 U4C.13@422.335,95.1
NetU4C_14: U4C.14 U5C.8 | length 5.9
  L1 w0.2: U5C.8@419.447,99.275 420.725,99.275 421.1,98.9 421.1,97.1 421.7,96.5 U4C.14@421.7,95.1
NetU4D_12: U4D.12 U5D.6 | length 7.7
  L1 w0.2: U5D.6@396.447,100.275 398.325,100.275 399.1,99.5 399.1,97.9 399.97,97.03 U4D.12@399.97,95.1
NetU4D_13: U4D.13 U5D.7 | length 6.8
  L1 w0.2: U5D.7@396.447,99.775 398.025,99.775 398.6,99.2 398.6,97.5 399.335,96.765 U4D.13@399.335,95.1
NetU4D_14: U4D.14 U5D.8 | length 5.9
  L1 w0.2: U5D.8@396.447,99.275 397.725,99.275 398.1,98.9 398.1,97.1 398.7,96.5 U4D.14@398.7,95.1
NetU4E_12: U4E.12 U5E.6 | length 7.7
  L1 w0.2: U5E.6@373.447,100.275 375.325,100.275 376.1,99.5 376.1,97.9 376.97,97.03 U4E.12@376.97,95.1
NetU4E_13: U4E.13 U5E.7 | length 6.8
  L1 w0.2: U5E.7@373.447,99.775 375.025,99.775 375.6,99.2 375.6,97.5 376.335,96.765 U4E.13@376.335,95.1
NetU4E_14: U4E.14 U5E.8 | length 5.9
  L1 w0.2: U5E.8@373.447,99.275 374.725,99.275 375.1,98.9 375.1,97.1 375.7,96.5 U4E.14@375.7,95.1
NetU4F_12: U4F.12 U5F.6 | length 7.7
  L1 w0.2: U5F.6@350.447,100.275 352.325,100.275 353.1,99.5 353.1,97.9 353.97,97.03 U4F.12@353.97,95.1
NetU4F_13: U4F.13 U5F.7 | length 6.8
  L1 w0.2: U5F.7@350.447,99.775 352.025,99.775 352.6,99.2 352.6,97.5 353.335,96.765 U4F.13@353.335,95.1
NetU4F_14: U4F.14 U5F.8 | length 5.9
  L1 w0.2: U5F.8@350.447,99.275 351.725,99.275 352.1,98.9 352.1,97.1 352.7,96.5 U4F.14@352.7,95.1
NetU4G_12: U4G.12 U5G.6 | length 7.7
  L1 w0.2: U5G.6@327.447,100.275 329.325,100.275 330.1,99.5 330.1,97.9 330.97,97.03 U4G.12@330.97,95.1
NetU4G_13: U4G.13 U5G.7 | length 6.8
  L1 w0.2: U5G.7@327.447,99.775 329.025,99.775 329.6,99.2 329.6,97.5 330.335,96.765 U4G.13@330.335,95.1
NetU4G_14: U4G.14 U5G.8 | length 5.9
  L1 w0.2: U5G.8@327.447,99.275 328.725,99.275 329.1,98.9 329.1,97.1 329.7,96.5 U4G.14@329.7,95.1
NetU4H_12: U4H.12 U5H.6 | length 7.7
  L1 w0.2: U5H.6@304.447,100.275 306.325,100.275 307.1,99.5 307.1,97.9 307.97,97.03 U4H.12@307.97,95.1
NetU4H_13: U4H.13 U5H.7 | length 6.8
  L1 w0.2: U5H.7@304.447,99.775 306.025,99.775 306.6,99.2 306.6,97.5 307.335,96.765 U4H.13@307.335,95.1
NetU4H_14: U4H.14 U5H.8 | length 5.9
  L1 w0.2: U5H.8@304.447,99.275 305.725,99.275 306.1,98.9 306.1,97.1 306.7,96.5 U4H.14@306.7,95.1
NetU4I_12: U4I.12 U5I.6 | length 7.7
  L1 w0.2: U5I.6@281.447,100.275 283.325,100.275 284.1,99.5 284.1,97.9 284.97,97.03 U4I.12@284.97,95.1
NetU4I_13: U4I.13 U5I.7 | length 6.8
  L1 w0.2: U5I.7@281.447,99.775 283.025,99.775 283.6,99.2 283.6,97.5 284.335,96.765 U4I.13@284.335,95.1
NetU4I_14: U4I.14 U5I.8 | length 5.9
  L1 w0.2: U5I.8@281.447,99.275 282.725,99.275 283.1,98.9 283.1,97.1 283.7,96.5 U4I.14@283.7,95.1
NetU4J_12: U4J.12 U5J.6 | length 7.7
  L1 w0.2: U5J.6@258.447,100.275 260.325,100.275 261.1,99.5 261.1,97.9 261.97,97.03 U4J.12@261.97,95.1
NetU4J_13: U4J.13 U5J.7 | length 6.8
  L1 w0.2: U5J.7@258.447,99.775 260.025,99.775 260.6,99.2 260.6,97.5 261.335,96.765 U4J.13@261.335,95.1
NetU4J_14: U4J.14 U5J.8 | length 5.9
  L1 w0.2: U5J.8@258.447,99.275 259.725,99.275 260.1,98.9 260.1,97.1 260.7,96.5 U4J.14@260.7,95.1
NetU4K_12: U4K.12 U5K.6 | length 7.7
  L1 w0.2: U5K.6@235.447,100.275 237.325,100.275 238.1,99.5 238.1,97.9 238.97,97.03 U4K.12@238.97,95.1
NetU4K_13: U4K.13 U5K.7 | length 6.8
  L1 w0.2: U5K.7@235.447,99.775 237.025,99.775 237.6,99.2 237.6,97.5 238.335,96.765 U4K.13@238.335,95.1
NetU4K_14: U4K.14 U5K.8 | length 5.9
  L1 w0.2: U5K.8@235.447,99.275 236.725,99.275 237.1,98.9 237.1,97.1 237.7,96.5 U4K.14@237.7,95.1
NetU4L_12: U4L.12 U5L.6 | length 7.7
  L1 w0.2: U5L.6@212.447,100.275 214.325,100.275 215.1,99.5 215.1,97.9 215.97,97.03 U4L.12@215.97,95.1
NetU4L_13: U4L.13 U5L.7 | length 6.8
  L1 w0.2: U5L.7@212.447,99.775 214.025,99.775 214.6,99.2 214.6,97.5 215.335,96.765 U4L.13@215.335,95.1
NetU4L_14: U4L.14 U5L.8 | length 5.9
  L1 w0.2: U5L.8@212.447,99.275 213.725,99.275 214.1,98.9 214.1,97.1 214.7,96.5 U4L.14@214.7,95.1
NetU4M_12: U4M.12 U5M.6 | length 7.7
  L1 w0.2: U5M.6@189.447,100.275 191.325,100.275 192.1,99.5 192.1,97.9 192.97,97.03 U4M.12@192.97,95.1
NetU4M_13: U4M.13 U5M.7 | length 6.8
  L1 w0.2: U5M.7@189.447,99.775 191.025,99.775 191.6,99.2 191.6,97.5 192.335,96.765 U4M.13@192.335,95.1
NetU4M_14: U4M.14 U5M.8 | length 5.9
  L1 w0.2: U5M.8@189.447,99.275 190.725,99.275 191.1,98.9 191.1,97.1 191.7,96.5 U4M.14@191.7,95.1
NetU4N_12: U4N.12 U5N.6 | length 7.7
  L1 w0.2: U5N.6@166.447,100.275 168.325,100.275 169.1,99.5 169.1,97.9 169.97,97.03 U4N.12@169.97,95.1
NetU4N_13: U4N.13 U5N.7 | length 6.8
  L1 w0.2: U5N.7@166.447,99.775 168.025,99.775 168.6,99.2 168.6,97.5 169.335,96.765 U4N.13@169.335,95.1
NetU4N_14: U4N.14 U5N.8 | length 5.9
  L1 w0.2: U5N.8@166.447,99.275 167.725,99.275 168.1,98.9 168.1,97.1 168.7,96.5 U4N.14@168.7,95.1
NetU4O_12: U4O.12 U5O.6 | length 7.7
  L1 w0.2: U5O.6@143.447,100.275 145.325,100.275 146.1,99.5 146.1,97.9 146.97,97.03 U4O.12@146.97,95.1
NetU4O_13: U4O.13 U5O.7 | length 6.8
  L1 w0.2: U5O.7@143.447,99.775 145.025,99.775 145.6,99.2 145.6,97.5 146.335,96.765 U4O.13@146.335,95.1
NetU4O_14: U4O.14 U5O.8 | length 5.9
  L1 w0.2: U5O.8@143.447,99.275 144.725,99.275 145.1,98.9 145.1,97.1 145.7,96.5 U4O.14@145.7,95.1
NetU4P_12: U4P.12 U5P.6 | length 7.7
  L1 w0.2: U5P.6@120.447,100.275 122.325,100.275 123.1,99.5 123.1,97.9 123.97,97.03 U4P.12@123.97,95.1
NetU4P_13: U4P.13 U5P.7 | length 6.8
  L1 w0.2: U5P.7@120.447,99.775 122.025,99.775 122.6,99.2 122.6,97.5 123.335,96.765 U4P.13@123.335,95.1
NetU4P_14: U4P.14 U5P.8 | length 5.9
  L1 w0.2: U5P.8@120.447,99.275 121.725,99.275 122.1,98.9 122.1,97.1 122.7,96.5 U4P.14@122.7,95.1
OSC_IN_2: C16.1 U1.5 X1.3 | length 8.6
  L1 w0.203: U1.5@494.2,100.1 494.2,100.9 494.6,101.3 494.6,105.1 494.4,105.3 494.4,106.6 494.9,107.1 X1.3@495.075,107.1 C16.1@496,107.1
OSC_OUT_2: C15.1 U1.6 X1.1 | length 7.3
  L1 w0.2: C15.1@492.8,106.1 X1.1@493.725,106.1 493.725,105.275 494.2,104.8 494.2,101.5 493.7,101 U1.6@493.7,100.1
PWR_EN00_1: Q2A.3 R14A.1 U9A.4 | length 77.3
  L1 w0.2: U9A.4@415.8,67.875 417.175,67.875 419.6,70.3 419.6,73.9 420.5,74.8 425.8,74.8 428,72.6 433,72.6 436.2,75.8 449.1,75.8 451.3,73.6 455.293,73.6 458.093,76.4 471.9,76.4 474,74.3 478.1,74.3 478.8,75 478.8,76.5 478.5,76.8 R14A.1@477.9,76.8 477.9,78.025 Q2A.3@477.85,78.075
PWR_EN01_1: Q2B.3 R14B.1 U9A.6 | length 51.6
  L1 w0.2: U9A.6@415.8,69.175 416.975,69.175 418.6,70.8 418.6,74.4 420,75.8 426.2,75.8 428.4,73.6 432.6,73.6 435.8,76.8 449.6,76.8 451.8,74.6 455.1,74.6 455.6,75.1 455.6,76.6 455.4,76.8 R14B.1@454.9,76.8 454.9,78.025 Q2B.3@454.85,78.075
PWR_EN02_1: Q2C.3 R14C.1 U9A.8 | length 26.4
  L1 w0.2: U9A.8@415.8,70.475 416.875,70.475 417.6,71.2 417.6,74.8 419.6,76.8 426.6,76.8 428.8,74.6 432.2,74.6 432.8,75.2 432.8,76.4 432.4,76.8 R14C.1@431.9,76.8 431.9,78.025 Q2C.3@431.85,78.075
PWR_EN03_1: Q2D.3 R14D.1 U9A.11 | length 13.1
  L1 w0.2: Q2D.3@408.85,78.075 408.9,78.025 R14D.1@408.9,76.8 v1(410.3,76.8) ; v1(415.1,76.8) 415.1,74.3 414.6,73.8 414.6,72.7 414.875,72.425 U9A.11@415.8,72.425
  L4 w0.2: v1(410.3,76.8) v1(415.1,76.8)
PWR_EN04_1: Q2E.3 R14E.1 U9A.14 | length 27.2
  L1 w0.2: Q2E.3@385.85,78.075 385.9,78.025 R14E.1@385.9,76.8 402.9,76.8 407.275,72.425 U9A.14@410,72.425
PWR_EN05_1: Q2F.3 R14F.1 U9A.16 | length 52.3
  L1 w0.2: R14F.1@362.9,76.8 362.9,78.025 365.175,78.025 366.9,76.3 379.9,76.3 382,74.2 386.3,74.2 387.7,75.6 402.5,75.6 406.975,71.125 U9A.16@410,71.125
PWR_EN06_1: Q2G.3 R14G.1 U9A.18 | length 81.3
  L1 w0.2: Q2G.3@339.85,78.075 339.9,78.025 R14G.1@339.9,76.8 v1(341.5,76.8) ; v1(407,69.825) U9A.18@410,69.825
  L4 w0.2: v1(341.5,76.8) 341.5,70.8 344,68.3 382,68.3 384.1,66.2 390.9,66.2 392.6,67.9 402.9,67.9 405.4,70.4 406.425,70.4 v1(407,69.825)
PWR_EN07_1: Q2H.3 R14H.1 U9A.20 | length 101.1
  L1 w0.2: Q2H.3@316.85,78.075 316.9,78.025 R14H.1@316.9,76.8 v1(318.3,76.8) ; v1(405.7,68.6) 405.775,68.525 U9A.20@410,68.525
  L4 w0.2: v1(318.3,76.8) 319.7,76.8 329,67.5 381.6,67.5 383.7,65.4 391.5,65.4 392.2,64.7 401.8,64.7 v1(405.7,68.6)
PWR_EN08_1: Q2I.3 R14I.1 U9B.4 | length 97.8
  L1 w0.2: U9B.4@208.2,67.875 211.125,67.875 v1(211.2,67.8) ; R14I.1@293.9,76.8 293.9,78.025 Q2I.3@293.85,78.075 294.675,78.075 v1(294.7,78.1)
  L4 w0.2: v1(211.2,67.8) 247.1,67.8 248.6,66.3 257,66.3 258.5,67.8 290.6,67.8 294.7,71.9 v1(294.7,78.1)
PWR_EN09_1: Q2J.3 R14J.1 U9B.6 | length 78.9
  L1 w0.2: U9B.6@208.2,69.175 210.075,69.175 215.5,74.6 218.5,74.6 220,73.1 226.9,73.1 229.9,76.1 242.1,76.1 244.2,74 248.4,74 255.9,81.5 271.7,81.5 272.3,80.9 272.3,77.3 271.8,76.8 R14J.1@270.9,76.8 270.9,78.025 Q2J.3@270.85,78.075
PWR_EN10_1: Q2K.3 R14K.1 U9B.8 | length 52.1
  L1 w0.2: U9B.8@208.2,70.475 209.775,70.475 214.9,75.6 219.2,75.6 220.7,74.1 226.3,74.1 233.6,81.4 248.6,81.4 249.2,80.8 249.2,78.6 248.675,78.075 Q2K.3@247.85,78.075 247.9,78.025 R14K.1@247.9,76.8
PWR_EN11_1: Q2L.3 R14L.1 U9B.10 | length 28.2
  L1 w0.2: U9B.10@208.2,71.775 209.475,71.775 219.8,82.1 225.3,82.1 226.3,81.1 226.3,78.7 225.675,78.075 Q2L.3@224.85,78.075 224.9,78.025 R14L.1@224.9,76.8
PWR_EN12_1: Q2M.3 R14M.1 U9B.13 | length 5.7
  L1 w0.2: Q2M.3@201.85,78.075 201.9,78.025 R14M.1@201.9,76.8 202.4,76.8 202.6,76.6 202.6,74.5 202.4,74.3 U9B.13@202.4,73.075
PWR_EN13_1: Q2N.3 R14N.1 U9B.15 | length 26.9
  L1 w0.2: Q2N.3@178.85,78.075 178.9,78.025 R14N.1@178.9,76.8 195.8,76.8 200.825,71.775 U9B.15@202.4,71.775
PWR_EN14_1: Q2O.3 R14O.1 U9B.17 | length 51.7
  L1 w0.2: Q2O.3@155.85,78.075 155.9,78.025 R14O.1@155.9,76.8 158,76.8 159.8,75 173.6,75 174.7,73.9 179.4,73.9 181,75.5 195.5,75.5 200.525,70.475 U9B.17@202.4,70.475
PWR_EN15_1: Q2P.3 R14P.1 U9B.20 | length 79.5
  L1 w0.2: R14P.1@132.9,76.8 132.9,78.025 Q2P.3@132.85,78.075 132.925,78 v1(133.7,78) ; v1(200.5,68.5) 200.525,68.525 U9B.20@202.4,68.525
  L4 w0.2: v1(133.7,78) 136.2,78 140,74.2 140,70.8 143.3,67.5 173.8,67.5 176,65.3 185,65.3 187.2,67.5 199.5,67.5 v1(200.5,68.5)
RMII.CRS_DV_1: R91.2 U1.23 | length 24.3
  L1 w0.203: R91.2@485.9,113 483.8,113 482.5,111.7 482.5,95.9 483,95.4 485.1,95.4 485.4,95.1 U1.23@486.7,95.1
RMII.RXD0_1: R92.2 U1.24 | length 27.1
  L1 w0.203: R92.2@485.9,114.8 483.8,114.8 482,113 482,95.7 482.8,94.9 484.9,94.9 485.2,94.6 U1.24@486.7,94.6
RMII.RXD1_1: R93.2 U1.25 | length 28.9
  L1 w0.203: R93.2@485.9,115.6 483.8,115.6 481.5,113.3 481.5,95.5 482.6,94.4 484.7,94.4 485,94.1 U1.25@486.7,94.1
RMII.TX_EN_1: R38.1 U7.16 | length 23.5
  L1 w0.203: v1(483.004,106.5) 483.004,96.996 483.4,96.6 R38.1@483.4,96.1 ; U7.16@490.15,111.75 490.15,110.25 490.5,109.9 v1(490.5,106.5)
  L4 w0.203: v1(483.004,106.5) v1(490.5,106.5)
RMII.TXD0_1: R40.1 U7.17 | length 27
  L1 w0.203: R40.1@486.8,88.5 487,88.7 487,89.1 487.1,89.2 v1(487.1,89.6) ; U7.17@490.65,111.75 490.65,110.55 491.1,110.1 v1(491.1,108.2)
  L4 w0.203: v1(487.1,89.6) 487.1,94.7 492.8,100.4 492.8,101.6 491.4,103 491.4,104.7 491.8,105.1 491.8,107.5 v1(491.1,108.2)
RMII.TXD1_1: R41.1 U7.18 | length 31.1
  L1 w0.2: v1(489.1,84.6) R41.1@489.1,85.3 ; U7.18@491.15,111.75 491.15,111.25 491.8,110.6 491.8,109.1 v1(492.2,108.7)
  L4 w0.2: v1(489.1,84.6) 489.1,95.6 493.6,100.1 493.6,102 492.2,103.4 492.2,104.3 492.7,104.8 492.7,108.2 v1(492.2,108.7)
RX_N: J2.8 R90.2 U7.22 | length 21.5
  L1 w0.218: U7.22@491.85,113.95 492.55,113.95 492.8,114.2 492.812,114.188 v1(493.412,114.188) 494.112,114.188 R90.2@494.2,114.1
  L4 w0.218: v1(493.412,114.188) 493.558,114.335 495.073,114.335 495.9,115.162 495.9,119.2 497.4,120.7 501.5,120.7 503.3,118.9 503.3,117.144 J2.8@502.22,116.064
RX_P: J2.1 R88.2 U7.23 | length 21.9
  L1 w0.218: U7.23@491.85,114.45 492.35,114.45 v1(492.8,114.9) R88.2@494.2,114.9
  L4 w0.218: v1(492.8,114.9) 492.947,114.753 494.9,114.753 495.482,115.335 495.482,119.373 497.227,121.118 501.673,121.118 503.718,119.073 503.718,118 504.638,117.08 J2.1@504.76,117.08
SMI.MDC_1: U1.9 U7.13 | length 21.9
  L1 w0.203: v1(485.1,102.1) 485.1,103.9 484.2,104.8 484.2,108 487.3,111.1 488.4,111.1 488.65,111.35 U7.13@488.65,111.75 ; U1.9@492.2,100.1 v1(492.2,101.4)
  L4 w0.203: v1(485.1,102.1) 488.5,102.1 490,100.6 491.4,100.6 v1(492.2,101.4)
SMI.MDIO_1: R52.1 R81.2 U1.16 | length 16.7
  L1 w0.203: v1(484.5,101.5) 484.5,103.6 483.7,104.4 483.7,108.6 485.9,110.8 R81.2@485.9,112.2 ; v1(486.502,101.5) 486.501,101.499 R52.1@487.8,100.2 487.9,100.1 U1.16@488.7,100.1
  L4 w0.203: v1(484.5,101.5) v1(486.502,101.5)
SPI2.MOSI_1: R33.1 U4A.3 U4B.3 U4C.3 U4D.3 U4E.3 U4F.3 U4G.3 U4H.3 U4I.3 U4J.3 U4K.3 U4L.3 U4M.3 U4N.3 U4O.3 U4P.3 | length 477.5
  L1 w0.2: v1(122.4,84.5) v1(145.4,84.5) v1(168.4,84.5) v1(191.4,84.5) v1(214.4,84.5) v1(237.4,84.5) v1(260.4,84.5) v1(283.4,84.5) v1(306.4,84.5) v1(329.4,84.5) v1(352.4,84.5) v1(375.4,84.5) v1(398.4,84.5) v1(421.4,84.5) v1(444.4,84.5) v1(467.4,84.5) 478,84.5 478.7,85.2 v1(478.7,105.8) ; v1(122.4,88.3) 122.7,88.6 U4P.3@122.7,89.7 ; v1(145.4,88.3) 145.7,88.6 U4O.3@145.7,89.7 ; v1(168.4,88.3) 168.7,88.6 U4N.3@168.7,89.7 ; v1(191.4,88.3) 191.7,88.6 U4M.3@191.7,89.7 ; v1(214.4,88.3) 214.7,88.6 U4L.3@214.7,89.7 ; v1(237.4,88.3) 237.7,88.6 U4K.3@237.7,89.7 ; v1(260.4,88.3) 260.7,88.6 U4J.3@260.7,89.7 ; v1(283.4,88.3) 283.7,88.6 U4I.3@283.7,89.7 ; v1(306.4,88.3) 306.7,88.6 U4H.3@306.7,89.7 ; v1(329.4,88.3) 329.7,88.6 U4G.3@329.7,89.7 ; v1(352.4,88.3) 352.7,88.6 U4F.3@352.7,89.7 ; v1(375.4,88.3) 375.7,88.6 U4E.3@375.7,89.7 ; v1(398.4,88.3) 398.7,88.6 U4D.3@398.7,89.7 ; v1(421.4,88.3) 421.7,88.6 U4C.3@421.7,89.7 ; v1(444.4,88.3) 444.7,88.6 U4B.3@444.7,89.7 ; v1(467.4,88.3) 467.7,88.6 U4A.3@467.7,89.7 ; R33.1@491.2,103.3 v1@491.2,105.9
  L4 w0.2: v1(122.4,84.5) v1(122.4,88.3) ; v1(145.4,84.5) v1(145.4,88.3) ; v1(168.4,84.5) v1(168.4,88.3) ; v1(191.4,84.5) v1(191.4,88.3) ; v1(214.4,84.5) v1(214.4,88.3) ; v1(237.4,84.5) v1(237.4,88.3) ; v1(260.4,84.5) v1(260.4,88.3) ; v1(283.4,84.5) v1(283.4,88.3) ; v1(306.4,84.5) v1(306.4,88.3) ; v1(329.4,84.5) v1(329.4,88.3) ; v1(352.4,84.5) v1(352.4,88.3) ; v1(375.4,84.5) v1(375.4,88.3) ; v1(398.4,84.5) v1(398.4,88.3) ; v1(421.4,84.5) v1(421.4,88.3) ; v1(444.4,84.5) v1(444.4,88.3) ; v1(467.4,84.5) v1(467.4,88.3) ; v1(478.7,105.8) v1(491.2,105.8)
SPI2.SCK_1: R31.1 U4A.5 U4B.5 U4C.5 U4D.5 U4E.5 U4F.5 U4G.5 U4H.5 U4I.5 U4J.5 U4K.5 U4L.5 U4M.5 U4N.5 U4O.5 U4P.5 | length 460.1
  L1 w0.2: U4P.5@123.97,89.7 123.97,88.63 v1(124.3,88.3) ; v1(124.3,83.9) v1(147.3,83.9) v1(170.3,83.9) v1(193.3,83.9) v1(216.3,83.9) v1(239.3,83.9) v1(262.3,83.9) v1(285.3,83.9) v1(308.3,83.9) v1(331.3,83.9) v1(354.3,83.9) v1(377.3,83.9) v1(400.3,83.9) v1(423.3,83.9) v1(446.3,83.9) v1(469.3,83.9) 478.4,83.9 480.5,86 482,86 483.4,87.4 R31.1@483.4,92 ; U4O.5@146.97,89.7 146.97,88.63 v1(147.3,88.3) ; U4N.5@169.97,89.7 169.97,88.63 v1(170.3,88.3) ; U4M.5@192.97,89.7 192.97,88.63 v1(193.3,88.3) ; U4L.5@215.97,89.7 215.97,88.63 v1(216.3,88.3) ; U4K.5@238.97,89.7 238.97,88.63 v1(239.3,88.3) ; U4J.5@261.97,89.7 261.97,88.63 v1(262.3,88.3) ; U4I.5@284.97,89.7 284.97,88.63 v1(285.3,88.3) ; U4H.5@307.97,89.7 307.97,88.63 v1(308.3,88.3) ; U4G.5@330.97,89.7 330.97,88.63 v1(331.3,88.3) ; U4F.5@353.97,89.7 353.97,88.63 v1(354.3,88.3) ; U4E.5@376.97,89.7 376.97,88.63 v1(377.3,88.3) ; U4D.5@399.97,89.7 399.97,88.63 v1(400.3,88.3) ; U4C.5@422.97,89.7 422.97,88.63 v1(423.3,88.3) ; U4B.5@445.97,89.7 445.97,88.63 v1(446.3,88.3) ; U4A.5@468.97,89.7 468.97,88.63 v1(469.3,88.3)
  L4 w0.2: v1(124.3,83.9) v1(124.3,88.3) ; v1(147.3,83.9) v1(147.3,88.3) ; v1(170.3,83.9) v1(170.3,88.3) ; v1(193.3,83.9) v1(193.3,88.3) ; v1(216.3,83.9) v1(216.3,88.3) ; v1(239.3,83.9) v1(239.3,88.3) ; v1(262.3,83.9) v1(262.3,88.3) ; v1(285.3,83.9) v1(285.3,88.3) ; v1(308.3,83.9) v1(308.3,88.3) ; v1(331.3,83.9) v1(331.3,88.3) ; v1(354.3,83.9) v1(354.3,88.3) ; v1(377.3,83.9) v1(377.3,88.3) ; v1(400.3,83.9) v1(400.3,88.3) ; v1(423.3,83.9) v1(423.3,88.3) ; v1(446.3,83.9) v1(446.3,88.3) ; v1(469.3,83.9) v1(469.3,88.3)
SWD.SWCLK_2: R26.1 U1.49 | length 44
  L1 w0.203: U1.49@498.2,90.6 504.1,90.6 506.4,92.9 v1(510,92.9) ; v1(517.4,120.5) R26.1@517.4,121.1
  L4 w0.203: v1(510,92.9) 510,101.9 517.4,109.3 v1(517.4,120.5)
SWD.SWDIO_2: R22.1 U1.46 | length 51.5
  L1 w0.203: U1.46@495.2,88.6 495.2,87.75 495.9,87.05 502.15,87.05 506.6,91.5 v1(510.7,91.5) ; v1(519,120.5) R22.1@519,121.1
  L4 w0.203: v1(510.7,91.5) 510.7,101.7 518,109 518,119.5 v1(519,120.5)
SWD.SWO_2: R6.1 U1.55 | length 41.5
  L1 w0.203: U1.55@498.2,93.6 v1(509.4,93.6) ; v1(516.1,120.5) R6.1@516.1,121.1
  L4 w0.203: v1(509.4,93.6) 509.4,102.2 516.1,108.9 v1(516.1,120.5)
SWITCHEDA: C22A.1 Q2A.1 Q2A.2 Q2A.5 Q2A.6 U6A.2 | length 10
  L1 w0.5: U6A.2@473.55,80.43 473.645,80.525 Q2A.6@475.95,80.525 ; Q2A.1@475.95,78.075 Q2A.6@475.95,80.525 ; C22A.1@476.85,76.4 476.9,76.45 Q2A.2@476.9,78.075 Q2A.5@476.9,80.525 Q2A.6@475.95,80.525
SWITCHEDB: C22B.1 Q2B.1 Q2B.2 Q2B.5 Q2B.6 U6B.2 | length 10
  L1 w0.5: U6B.2@450.55,80.43 450.645,80.525 Q2B.6@452.95,80.525 ; Q2B.1@452.95,78.075 Q2B.6@452.95,80.525 ; C22B.1@453.85,76.4 453.9,76.45 Q2B.2@453.9,78.075 Q2B.5@453.9,80.525 Q2B.6@452.95,80.525
SWITCHEDC: C22C.1 Q2C.1 Q2C.2 Q2C.5 Q2C.6 U6C.2 | length 10
  L1 w0.5: U6C.2@427.55,80.43 427.645,80.525 Q2C.6@429.95,80.525 ; Q2C.1@429.95,78.075 Q2C.6@429.95,80.525 ; C22C.1@430.85,76.4 430.9,76.45 Q2C.2@430.9,78.075 Q2C.5@430.9,80.525 Q2C.6@429.95,80.525
SWITCHEDD: C22D.1 Q2D.1 Q2D.2 Q2D.5 Q2D.6 U6D.2 | length 10
  L1 w0.5: U6D.2@404.55,80.43 404.645,80.525 Q2D.6@406.95,80.525 ; Q2D.1@406.95,78.075 Q2D.6@406.95,80.525 ; C22D.1@407.85,76.4 407.9,76.45 Q2D.2@407.9,78.075 Q2D.5@407.9,80.525 Q2D.6@406.95,80.525